# Altium PCB MCBPCB.PcbDoc (part 1 of 2)
Units mm, origin at the board's own origin, x right, y up, seen from the top; angles counter-clockwise.
Board outline 152.4 x 101.6 mm, 2 copper layers (Top Layer, Bottom Layer); 64 components, 34 nets, 224 pads, 0 vias.
Unrouted connection lines stored in the file: 144.
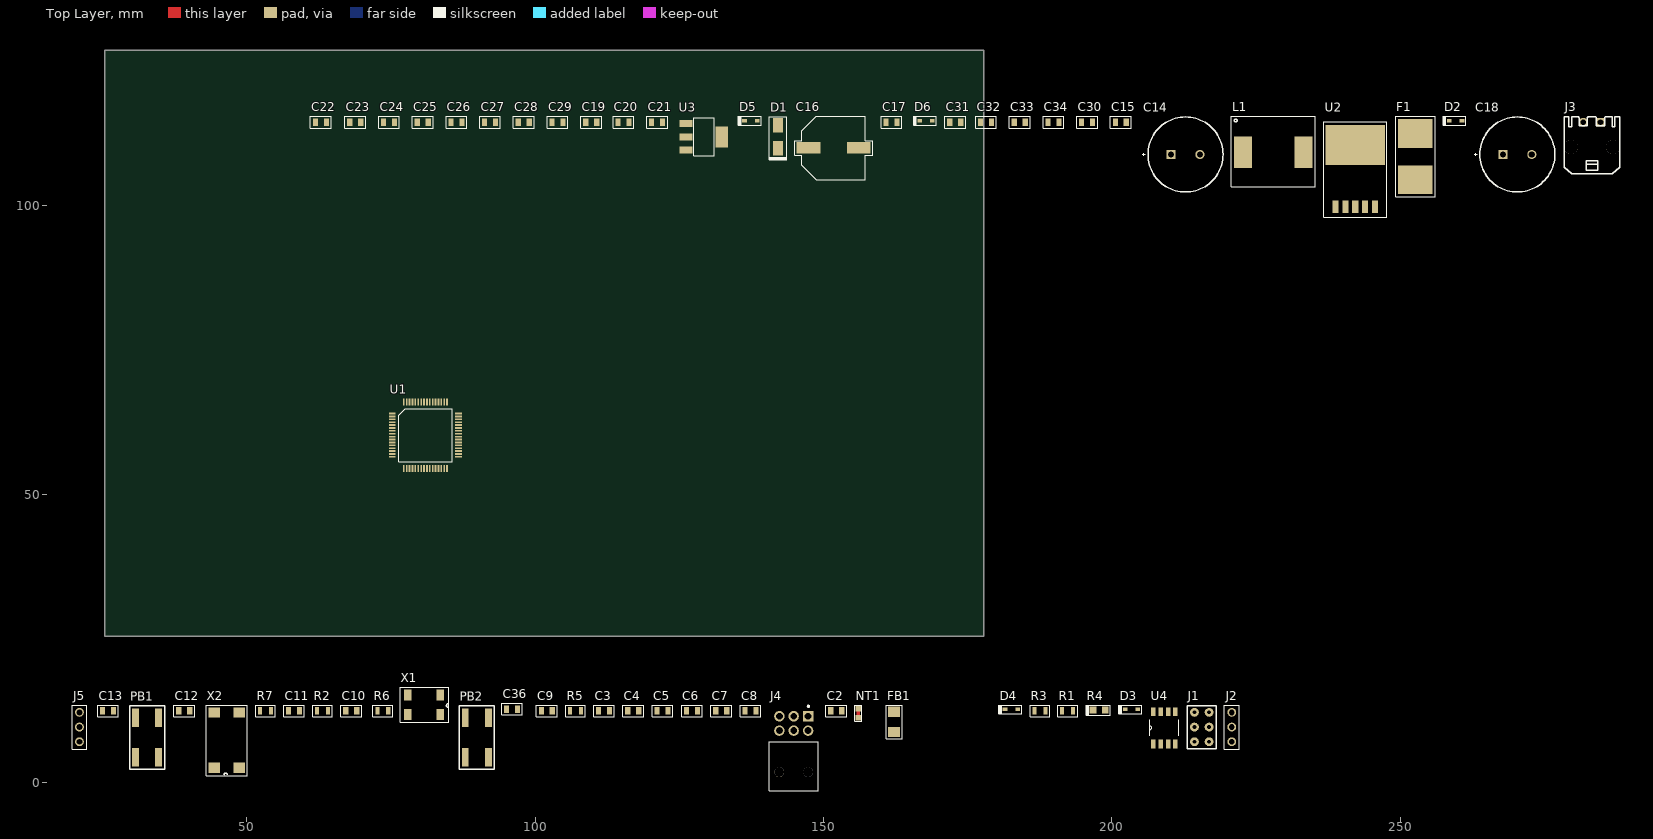
[diagram p0: Top Layer view]
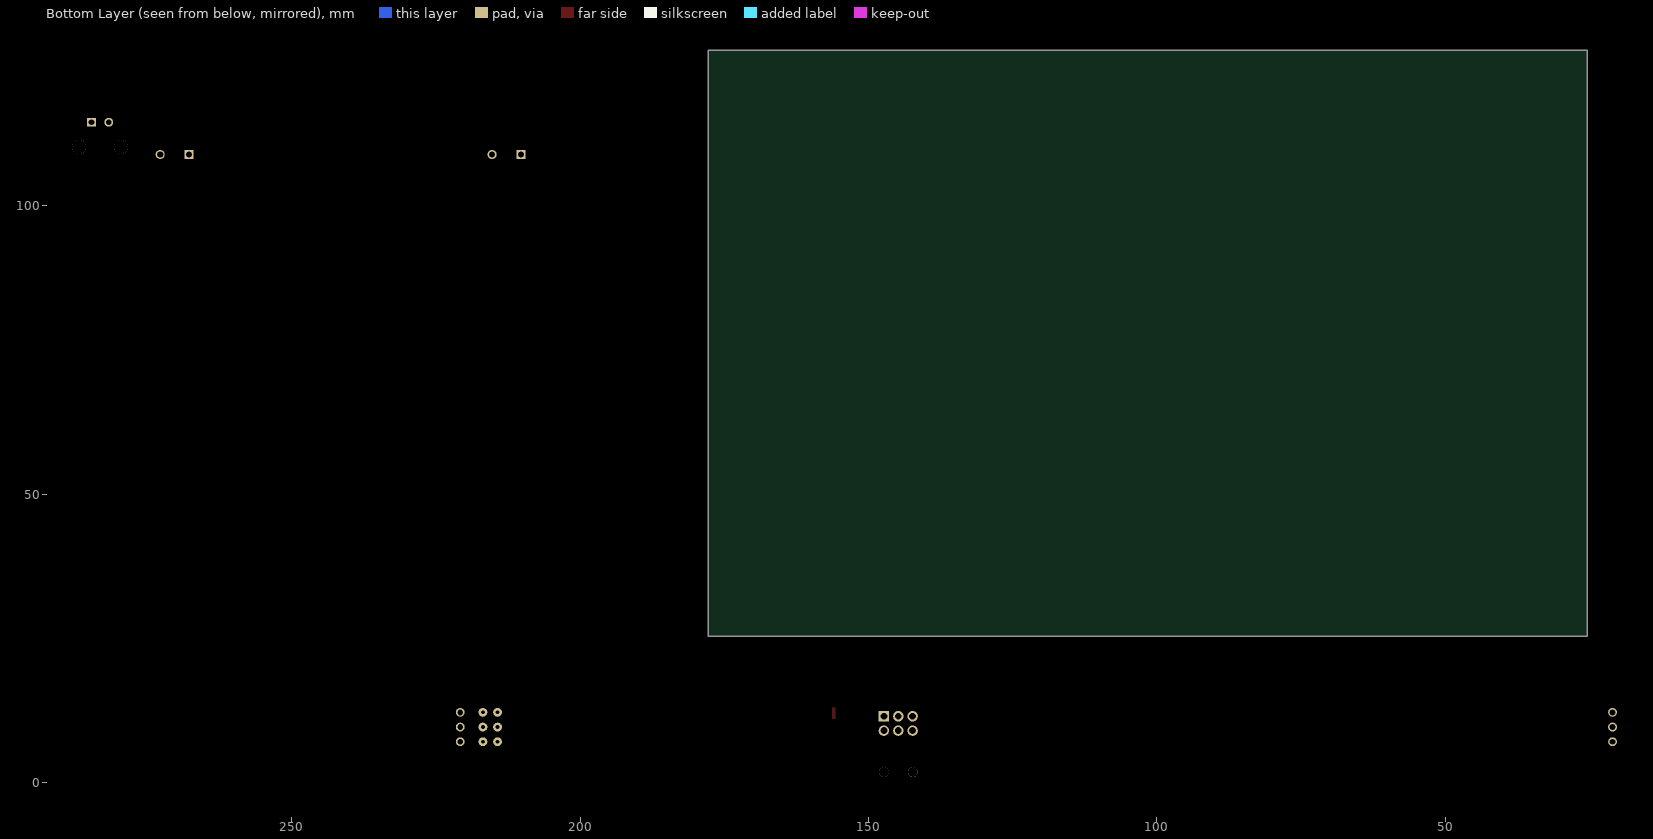
[diagram p1: Bottom Layer view, seen from below]

## Layer stack, top to bottom
Top Solder: solder mask 0.0102, Solder Resist, Dk 3.5
Top Layer: signal copper 0.0356
Dielectric 1: dielectric 0.32, FR-4, Dk 4.8
Bottom Layer: signal copper 0.0356
Bottom Solder: solder mask 0.0102, Solder Resist, Dk 3.5

## Board outline
25.4,25.4 177.8,25.4 177.8,127 25.4,127

## Design rules (kind name [scope] priority, off if disabled: settings)
Clearance [All] p1 off: gap=0.254 ignorepadtopadclearanceinfootprint=FALSE except(0: Arc-Hole Track-Hole SMDPad-Hole THPad-Hole Via-Hole Fill-Hole Poly-Hole Region-Hole Text-Hole)
PolygonConnect [All] p1: connectstyle=Relief reliefconductorwidth=0.254 reliefentries=4 polygonreliefangle="90 Angle" airgapwidth=0.254
RoomDefinition "Power Supply" [InComponentClass('Power Supply')] p1: confinementstyle=ConfineIn formatcopy=TRUE lockcomponents=FALSE outline 29.876,125.358 140.126,125.358 140.126,99.983 29.876,99.983
RoomDefinition M1 [InComponentClass('M1')] p2: confinementstyle=ConfineIn formatcopy=TRUE lockcomponents=FALSE outline 19.497,0 222.697,0 222.697,19.177 19.497,19.177
RoutingVias [All] p1: holewidth=0.711 width=1.27 viastyle="Through Hole" minholewidth=0.711 minwidth=1.27 maxholewidth=0.711 maxwidth=1.27
SolderMaskExpansion [All] p1: expansion=0.102
Width [All] p1: maxlimit=0.254 minlimit=0.254 preferedwidth=0.254
30 further rules are at their usual default settings.

## Classes and differential pairs
component class "Power Supply": C14 C15 C16 C17 C18 C19 C20 C21 C22 C23 C24 C25 C26 C27 C28 C29 C30 C31 C32 C33 C34 D1 D2 D5 D6 F1 J3 L1 U2 U3
component class M1: C1 C2 C3 C4 C5 C6 C7 C8 C9 C10 C11 C12 C13 C35 C36 D3 D4 FB1 J1 J2 J4 J5 NT1 PB1 PB2 R1 R2 R3 R4 R5 R6 R7 U4 X1 X2

## Components (designator, comment, footprint, x,y, rotation, side; value= is the part's Value field where it differs from the comment)
C2 "1uF" C0805 152.212,12.446 r0 top
C3 "1uF" C0805 111.953,12.446 r0 top
C4 "0.1uF" C0805 117.033,12.446 r0 top
C5 "0.1uF" C0805 122.113,12.446 r0 top
C6 "0.1uF" C0805 127.193,12.446 r0 top
C7 "0.1uF" C0805 132.273,12.446 r0 top
C8 "4.7uF" C0805 137.353,12.446 r0 top
C9 "6nF" C0805 102.047,12.446 r0 top
C10 "6nF" C0805 68.138,12.446 r0 top
C11 "20pF" C0805 58.232,12.446 r0 top
C12 "20pF" C0805 39.182,12.446 r0 top
C13 "0.1uF" C0805 25.974,12.446 r0 top
C14 "100uF" UCY2C101MHD1TO 215.271,108.912 r0 top
C15 "47uF" C0805 201.555,114.5 r0 top
C16 "680uF" EEE-FP1C681AP 151.771,110.055 r0 top
C17 "47uF" C0805 161.804,114.5 r0 top
C18 "100uF" UCY2C101MHD1TO 272.802,108.912 r0 top
C19 "0.1uF" C0805 109.734,114.5 r0 top
C20 "10uF" C0805 115.322,114.5 r0 top
C21 "0.1uF" C0805 121.164,114.5 r0 top
C22 "1uF" C0805 62.871,114.5 r0 top
C23 "0.1uF" C0805 68.84,114.5 r0 top
C24 "0.1uF" C0805 74.682,114.5 r0 top
C25 "0.1uF" C0805 80.524,114.5 r0 top
C26 "0.1uF" C0805 86.366,114.5 r0 top
C27 "1uF" C0805 92.208,114.5 r0 top
C28 "1uF" C0805 98.05,114.5 r0 top
C29 "1uF" C0805 103.892,114.5 r0 top
C30 "0.1uF" C0805 195.713,114.5 r0 top
C31 "0.1uF" C0805 172.853,114.5 r0 top
C32 "0.1uF" C0805 178.187,114.5 r0 top
C33 "1uF" C0805 184.029,114.5 r0 top
C34 "1uF" C0805 189.871,114.5 r0 top
C36 "1uF" C0805 96,12.75 r0 top
D1 "B320A-FDICT-ND" "DIODE DO-214AC" 142.119,111.96 r90 top
D2 "12V" SOD-323 259.594,114.754 r0 top
D3 "TVS Diode 5V" SOD-323 203.393,12.7 r0 top
D4 "TVS Diode 5V" SOD-323 182.565,12.7 r0 top
D5 "TVS Diode 12V" SOD-323 137.42,114.754 r0 top
D6 "TVS Diode 5V" SOD-323 167.773,114.754 r0 top
F1 "Fuseholder" "SCHURTER - 0031.7701.11 - FUSE HOLDER, PCB MOUNT" 252.609,108.531 r90 top
FB1 "LF1206E152R-10" L1206 162.245,10.541 r90 top
J1 "M20-9980346" M20-9980346 214.315,7.112 r0 top
J2 "1x3 HDR100" "MOLEX 0901200763" 220.792,7.112 r90 top
J3 "1x2 Header, RA" "Right Angle Header 43650-0205(Primary)" 283.216,110.182 r0 top
J4 "2x3 Socket, RA" "MOLEX 105314 6 CON" 144.846,7.112 r0 top
J5 "1x3 HDR100" "MOLEX 0901200763" 21.021,7.112 r90 top
L1 "100uH" 7447709101 227.971,109.293 r0 top
NT1 "NET TIE" NETTIE 156.022,12.065 r90 top
PB1 "P12961SCT-ND" P12961SCT-ND 170.754,116.713 r90 top
PB2 "P12961SCT-ND" P12961SCT-ND 227.904,116.713 r90 top
R1 "10K" R0805 192.344,12.446 r0 top
R2 "10K" R0805 63.185,12.446 r0 top
R3 "10K" R0805 187.518,12.446 r0 top
R4 "120 ohm" L0805 197.805,12.573 r0 top
R5 "RC0402JR-074K7L" R0805 107,12.446 r0 top
R6 "150" R0805 73.599,12.446 r0 top
R7 "300" R0805 53.279,12.446 r0 top
U1 "STM32F103RBT7" stm32f103rb 75.25,64 r0 top
U2 "LM2576SX-5.0" TO263-5 242.195,103.07 r90 top
U3 "LD1117S33CTR" SOT-233 129.292,111.96 r0 top
U4 "CAN, MCP2551" LT1677IS8#TRPBF 209.108,9.525 r90 top
X1 "32.7680kHz" "MC-306 32.7680K-E5" 80.75,13.5 r180 top
X2 "8 MHz" "MA-406 8.0000M-G3" 46.548,7.366 r90 top

## Footprints (in the part's own frame and the unit in brackets; to place one, negate y for a bottom-side part, rotate by r counter-clockwise, add the part's x,y. Pads: shape width x height; smd on the part's side, far side on the other; paste and mask are expansions set on the pad)
7447709101 [mm]
  rect 3.1x5.4 smd: 1(-5.25,0) 2(5.25,0)
  silkscreen extent -7.25,-6 7.25,6.25, body extent -6,-6 6,6, height 9.47
C0805 [mm]
  rect 0.9x1.3 smd: 1(-0.95,0) 2(0.95,0)
  silkscreen extent -1.8,-1 1.8,1, body extent -1.05,-0.67 1.05,0.67, height 0.94
"DIODE DO-214AC" [mm]
  rect 2.5x1.7 smd: 1(-2,0) 2(2,0)
  silkscreen extent -4,-1.5 3.5,1.5, body extent -2.74,-1.4 2.74,1.4, height 2.3
EEE-FP1C681AP [mm]
  rect 4.1x2 smd: 1(-4.35,0) 2(4.35,0)
  silkscreen extent -6.75,-5.5 6.75,5.5, body extent -5.85,-5.15 5.85,5.15, height 10.21
L0805 [mm]
  rect 1.2x1.2 smd: 1(-1.05,0) 2(1.05,0)
  silkscreen extent -2.29,-0.89 1.91,0.89, body extent -1,-0.62 1,0.63, height 0.82
L1206 [mm]
  rect 1.76x2.06 smd: 1(-1.75,0) 2(1.75,0)
  silkscreen extent -2.95,-1.38 2.9,1.33, body extent -1.6,-0.8 1.6,0.8, height 2.54
LT1677IS8#TRPBF [mil] "IC OPAMP GP 7.2MHZ RRO 8SO"
  rect 60x30 smd: 1(-110,75) 2(-110,25) 3(-110,-25) 4(-110,-75) 5(110,-75) 6(110,-25) 7(110,25) 8(110,75)
  silkscreen extent -56,-99 56,99, body extent -121,-98 121,98, height 79
M20-9980346 [mil]
  round 60 hole 25.2: 1(0,200) 2(0,100) 3(0,0) 4(100,0) 5(100,100) 6(100,200)
  silkscreen extent -49,-49 148,246, body extent -51,-50 149,250, height 374
"MA-406 8.0000M-G3" [mm] "MA-406 8.0000M-G3"
  rect 1.8x2 smd: 1(-4.8,-2.2) 2(4.8,-2.2) 3(4.8,2.2) 4(-4.8,2.2)
  silkscreen extent -6.15,-3.52 6.1,3.55, body extent -5.77,-2.35 5.93,2.45, height 3.7
"MC-306 32.7680K-E5" [mm] "CRYSTAL 32.7680 KHZ 6.0PF SMD"
  rect 1.3x1.9 smd: 1(-2.8,-1.7) 2(2.8,-1.7) 3(2.8,1.7) 4(-2.8,1.7)
  silkscreen extent -4.3,-3.03 4.15,3, body extent -4.07,-1.77 3.93,2.03, height 2.39
"MOLEX 105314 6 CON" [mm]
  rect 1.8x1.8 hole 1.2: 1(2.5,4.408)
  round 1.8 hole 1.2: 2(2.5,1.908) 3(0,4.408) 4(0,1.908) 5(-2.5,4.408) 6(-2.5,1.908)
  round 1.7 hole 1.7 unplated: None(-2.5,-5.272) None(2.5,-5.272)
  silkscreen extent -4.22,-8.47 4.22,6.28, body extent -4.22,-9.87 4.22,4.79, height 8.85
"MOLEX 0901200763" [mil]
  round 60 hole 39.37: 1(0,0) 2(100,0) 3(200,0)
  silkscreen extent -50,-50 250,50, body extent -50,-49 250,49, height 365
NETTIE [mm]
  rect 1x1 smd paste+0 mask+0: 0(-0.8,0) 1(0.8,0)
  Top Layer region: -1,-0.3 1,-0.3 1,0.3 -1,0.3
  silkscreen extent -1.4,-0.6 1.4,0.6
P12961SCT-ND [mm] "SWITCH TACTILE SPST-NO 0.02A 15V"
  rect 3.2x1.2 smd: 1(-112.275,140) 2(-105.475,140) 3(-112.275,136) 4(-105.475,136)
  silkscreen extent -114.35,134.98 -103.38,141.05, body extent -112.17,135.1 -105.58,141.1, height 3.11
R0805 [mm]
  rect 0.7x1.3 smd: 1(-0.95,0) 2(0.95,0)
  silkscreen extent -1.7,-1 1.7,1, body extent -1.05,-0.67 1.05,0.68, height 0.6
"Right Angle Header 43650-0205(Primary)" [mm]
  rect 1.53x1.53 hole 1.02: 1(1.5,4.32)
  round 1.53 hole 1.02: 2(-1.5,4.32)
  round 2.413 hole 2.413 unplated: None(-3.645,0) None(3.645,0)
  silkscreen extent -4.82,-4.6 4.82,5.3, body extent -4.83,-4.59 4.83,5.31, height 5.58
"SCHURTER - 0031.7701.11 - FUSE HOLDER, PCB MOUNT" [mm]
  rect 5x6 smd: 1(-4,0) 2(4,0)
  silkscreen extent -6.98,-3.43 6.98,3.43, body extent -6.04,-2.6 6.04,2.6, height 6.01
SOD-323 [mm] "SOD, 2-Leads, Body 1.7x1.25mm"
  rect 0.8x0.6 smd: 1(-1.1,0) 2(1.1,0)
  silkscreen extent -2.16,-0.76 1.78,0.76, body extent -1.3,-0.67 1.3,0.68, height 1.1
SOT-233 [mil] "SOT223"
  rect 88x48 smd: 1(-122,91) 2(-122,0) 3(-122,-91)
  rect 86.61x141.73 smd: 4(122.01,0)
  silkscreen extent -69,-129 70,129, body extent -137,-128 137,128, height 100
stm32f103rb [mm]
  rect 1.2x0.3 smd: 1(0,0) 2(0,-0.5) 3(0,-1) 4(0,-1.5) 5(0,-2) 6(0,-2.5) 7(0,-3) 8(0,-3.5) 9(0,-4) 10(0,-4.5) 11(0,-5) 12(0,-5.5) 13(0,-6) 14(0,-6.5) 15(0,-7) 16(0,-7.5) 33(11.5,-7.5) 34(11.5,-7) 35(11.5,-6.5) 36(11.5,-6) 37(11.5,-5.5) 38(11.5,-5) 39(11.5,-4.5) 40(11.5,-4) 41(11.5,-3.5) 42(11.5,-3) 43(11.5,-2.5) 44(11.5,-2) 45(11.5,-1.5) 46(11.5,-1) 47(11.5,-0.5) 48(11.5,0)
  rect 0.3x1.2 smd: 17(2,-9.5) 18(2.5,-9.5) 19(3,-9.5) 20(3.5,-9.5) 21(4,-9.5) 22(4.5,-9.5) 23(5,-9.5) 24(5.5,-9.5) 25(6,-9.5) 26(6.5,-9.5) 27(7,-9.5) 28(7.5,-9.5) 29(8,-9.5) 30(8.5,-9.5) 31(9,-9.5) 32(9.5,-9.5) 49(9.5,2) 50(9,2) 51(8.5,2) 52(8,2) 53(7.5,2) 54(7,2) 55(6.5,2) 56(6,2) 57(5.5,2) 58(5,2) 59(4.5,2) 60(4,2) 61(3.5,2) 62(3,2) 63(2.5,2) 64(2,2)
  silkscreen extent 1.13,-8.36 10.36,0.87, body extent -0.2,-9.7 11.8,2.3, height 1.6
TO263-5 [mm]
  rect 2.16x1.07 smd: 1(-3.25,3.4) 2(-3.25,1.7) 3(-3.25,0) 4(-3.25,-1.7) 5(-3.25,-3.4)
  rect 6.99x10.3 smd: 6(7.5,0)
  silkscreen extent -5,-5.5 11.5,5.5, body extent -3.81,-5 12.5,4.91, height 4.22
UCY2C101MHD1TO [mil]
  rect 62x62 hole 42: 1(-196.85,0)
  round 62 hole 42: 2(0,0)
  silkscreen extent -394,-256 157,256, body extent -344,-246 148,246, height 778

## Part data
C2 C3 C22 C27 C28 C29 C33 C34 C36: library part CL21B105KAFNNNE, "Cap Ceramic 1uF 25V X7R 10% SMD 0805 125C T/R", Case/Package=0805, Case Code (Metric)=2012, Dielectric=X7R, Manufacturer=Samsung, Max Operating Temperature=125°C, Min Operating Temperature=-55°C, Package Quantity=1, Supplier Part Number 1=1276-1066-1-ND, Tolerance=10%, Voltage=25V, Capacitance=1uF, Case Code (Imperial)=0805, Category=Capacitors, ComponentLink1Description=https://datasheet.ciiva.com/25800/cl21b105kafnnne-25800163.pdf?src-supplier=Digi-Key, ComponentLink1URL=https://datasheet.ciiva.com/25800/cl21b105kafnnne-25800163.pdf?src-supplier=Digi-Key, ComponentLink2Description=https://datasheet.ciiva.com/15195/getdatasheetpartid-355205-15195880.pdf?src-supplier=Verical, ComponentLink2URL=https://datasheet.ciiva.com/15195/getdatasheetpartid-355205-15195880.pdf?src-supplier=Verical, Contact Plating=Tin, Depth=1.25mm, Height=1.25mm, Lead Free="Lead Free", Length=2mm, Manufacturer Part Number=CL21B105KAFNNNE, Mount="Surface Mount", Packaging="Tape and Reel", Pricing 1="1 = 0.10000, 10 = 0.07600, 100 = 0.03380, 500 = 0.02416, 1000 = 0.01898 (USD)", Radiation Hardening=No, RoHS=Yes, Stock 1=1606570, Supplier 1=Digi-Key, Thickness=0.053inch, Voltage Rating=25V, Voltage Rating (DC)=25V, Width=0.049inch
C4 C5 C6 C7 C13 C19 C21 C23 C24 C25 C26 C30 C31 C32: library part CL21B104KBCWPNC, "CAP CER 0.1UF 50V X7R 0805", Capacitance=100nF, Case/Package=0805, Case Code (Metric)=2012, Manufacturer=Samsung, Max Operating Temperature=125°C, Min Operating Temperature=-55°C, Ratings=AEC-Q200, Supplier Part Number 1=1276-6557-1-ND, Tolerance=10%, Voltage Rating=50V, Case Code (Imperial)=0805, Category=Capacitors, Features="Soft Termination", Length=0.079inch, Manufacturer Part Number=CL21B104KBCWPNC, Mount="Surface Mount", Packaging="Tape and Reel", Pricing 1="1 = 0.10000, 10 = 0.06700, 100 = 0.02990, 500 = 0.02138, 1000 = 0.01680 (USD)", RoHS=Yes, Stock 1=6545, Supplier 1=Digi-Key, Thickness=0.053inch, Width=0.049inch
C8: library part 311-1371-2-ND, "CAP CER 4.7UF 10V Y5V 0805", Case/Package=0805, Case Code (Metric)=2012, Dielectric=Y5V, Manufacturer 1=Yageo, Manufacturer Part Number 1=CC0805ZRY5V6BB475, Max Operating Temperature=85°C, Min Operating Temperature=-30°C, Package Quantity=1, Supplier Part Number 1=311-1371-1-ND, Tolerance=80%, Voltage Rating=10V, Capacitance=4.7uF, Case Code (Imperial)=0805, ComponentLink1Description=https://datasheet.ciiva.com/26863/getdatasheetpartid-251807-26863009.pdf?src-supplier=Verical, ComponentLink1URL=https://datasheet.ciiva.com/26863/getdatasheetpartid-251807-26863009.pdf?src-supplier=Verical, ComponentLink2Description=https://datasheet.ciiva.com/144/mlccorderingcode-144864.pdf?src-supplier=Digi-Key, ComponentLink2URL=https://datasheet.ciiva.com/144/mlccorderingcode-144864.pdf?src-supplier=Digi-Key, ComponentLink3Description=https://datasheet.ciiva.com/144/mlccorderingcode-144865.pdf?src-supplier=Digi-Key, ComponentLink3URL=https://datasheet.ciiva.com/144/mlccorderingcode-144865.pdf?src-supplier=Digi-Key, ComponentLink4Description=https://datasheet.ciiva.com/11465/upy-gphc-y5v-6-3v-to-50v-5-11465845.pdf?src-supplier=Avnet, ComponentLink4URL=https://datasheet.ciiva.com/11465/upy-gphc-y5v-6-3v-to-50v-5-11465845.pdf?src-supplier=Avnet, ComponentLink5Description=https://datasheet.ciiva.com/16624/upy-gphc-y5v-6-3v-to-50v-5-16624679.pdf?src-supplier=Avnet+Europe, ComponentLink5URL=https://datasheet.ciiva.com/16624/upy-gphc-y5v-6-3v-to-50v-5-16624679.pdf?src-supplier=Avnet+Europe, ComponentLink6Description=https://datasheet.ciiva.com/28450/1132289-28450855.pdf?src-supplier=Element14, ComponentLink6URL=https://datasheet.ciiva.com/28450/1132289-28450855.pdf?src-supplier=Element14, ComponentLink7Description=https://datasheet.ciiva.com/7978/1132289-7978222.pdf?src-supplier=Element14, ComponentLink7URL=https://datasheet.ciiva.com/7978/1132289-7978222.pdf?src-supplier=Element14, ComponentLink8Description=https://datasheet.ciiva.com/144/mlccorderingcode-144863.pdf?src-supplier=Digi-Key, ComponentLink8URL=https://datasheet.ciiva.com/144/mlccorderingcode-144863.pdf?src-supplier=Digi-Key, ComponentLink9Description=https://datasheet.ciiva.com/5425/upy-gp-np0-16v-to-50v-8-5425455.pdf?src-supplier=Mouser, ComponentLink9URL=https://datasheet.ciiva.com/5425/upy-gp-np0-16v-to-50v-8-5425455.pdf?src-supplier=Mouser, ComponentLink10Description=https://datasheet.ciiva.com/17004/upy-gphc-y5v-6-3v-to-50v-5-revised-17004479.pdf?src-supplier=Future+Electronics, ComponentLink10URL=https://datasheet.ciiva.com/17004/upy-gphc-y5v-6-3v-to-50v-5-revised-17004479.pdf?src-supplier=Future+Electronics, Composition=Ceramic, Depth=1.25mm, Halogen Free="Halogen Free", Height=0.85mm, Lead Free="Lead Free", Length=2mm, Mount="Surface Mount", Number of Pins=2, Packaging="Tape and Reel", Pricing 1="1=0.19000, 10=0.13200, 100=0.06670, 500=0.04564, 1000=0.04037 (USD)", Radiation Hardening=No, REACH SVHC=Unknown, RoHS=Yes, Stock 1=117585, Supplier 1=Digi-Key, Termination=SMD/SMT, Thickness=0.033inch, Voltage Rating (DC)=10V, Width=0.049inch
C9 C10: library part 478-10411-2-ND, "CAP CER 6PF 100V C0G/NP0 0805", Capacitance=9pF, Case/Package=0805, Case Code (Metric)=2012, Dielectric=C0G, Max Operating Temperature=125°C, Min Operating Temperature=-55°C, Package Quantity=4000, Voltage Rating=100V, Case Code (Imperial)=0805, ComponentLink1Description=https://www.digikey.com/product-detail/en/avx-corporation/08051A6R0CAT2A/478-10411-2-ND/1601219, ComponentLink1URL=https://www.digikey.com/product-detail/en/avx-corporation/08051A6R0CAT2A/478-10411-2-ND/1601219, Depth=1.25mm, Length=2.01mm, Mount="Surface Mount", Packaging="Tape and Reel", Radiation Hardening=No, RoHS=Yes, Supplier 1=Digi-Key, Supplier Part Number 1=478-10411-2-ND, Termination=SMD/SMT, Thickness=0.037inch, Voltage Rating (DC)=100V, Weight=0.000194oz, Width=1.25mm
C11 C12: library part C0805C200J5GACTU, "CAP CER 20PF 50V C0G/NP0 0805", Capacitance=10nF, Case/Package=0805, Case Code (Metric)=2012, Dielectric=X7R, Manufacturer=Samsung, Manufacturer Part Number=CL21B103KBANNNC, Max Operating Temperature=125°C, Min Operating Temperature=-55°C, Supplier Part Number 1=399-8033-1-ND, Tolerance=10%, Voltage=50V, Case Code (Imperial)=0805, Category=Capacitors, ComponentLink1Description=https://www.digikey.com/product-detail/en/kemet/C0805C200J5GACTU/399-8033-1-ND/3471756, ComponentLink1URL=https://www.digikey.com/product-detail/en/kemet/C0805C200J5GACTU/399-8033-1-ND/3471756, Contact Plating=Tin, Depth=1.25mm, Height=0.65mm, Lead Free="Lead Free", Length=2mm, Material=Ceramic, Mount="Surface Mount", Packaging="Tape and Reel", Radiation Hardening=No, RoHS=Yes, Supplier 1=Digi-Key, Thickness=0.03inch, Voltage Rating=50V, Voltage Rating (DC)=50V, Width=0.049inch
C14 C18: library part UCY2C101MHD1TO, "CAP ALUM 100UF 20% 160V RADIAL", Capacitance=9pF, Case/Package=0805, Case Code (Metric)=2012, Dielectric=C0G, Max Operating Temperature=125°C, Min Operating Temperature=-55°C, Package Quantity=4000, Supplier Part Number 1=493-4784-1-ND, Voltage Rating=100V, Case Code (Imperial)=0805, ComponentLink1Description=https://www.digikey.ca/product-detail/en/nichicon/UCY2C101MHD1TO/493-4784-1-ND/3129121, ComponentLink1URL=https://www.digikey.ca/product-detail/en/nichicon/UCY2C101MHD1TO/493-4784-1-ND/3129121, Depth=1.25mm, Length=2.01mm, Mount="Surface Mount", Packaging="Tape and Reel", Radiation Hardening=No, RoHS=Yes, Supplier 1=Digi-Key, Termination=SMD/SMT, Thickness=0.037inch, Voltage Rating (DC)=100V, Weight=0.000194oz, Width=1.25mm
C15 C17: library part GRM21BR61A476ME15L, "CAP CER 47UF 10V X5R 0805", Capacitance=4.7uF, Case/Package=0805, Case Code (Metric)=2012, Dielectric=Y5V, Max Operating Temperature=85°C, Min Operating Temperature=-30°C, Package Quantity=1, Supplier Part Number 1=490-9961-1-ND, Tolerance=80%, Voltage Rating=10V, Case Code (Imperial)=0805, Composition=Ceramic, Depth=1.25mm, Halogen Free="Halogen Free", Height=0.85mm, Lead Free="Lead Free", Length=2mm, Mount="Surface Mount", Number of Pins=2, Packaging="Tape and Reel", Radiation Hardening=No, REACH SVHC=Unknown, RoHS=Yes, Supplier 1=Digi-Key, Termination=SMD/SMT, Thickness=0.033inch, Voltage Rating (DC)=10V, Width=0.049inch
C16: library part EEE-FP1C681AP, "CAP ALUM 680UF 20% 16V SMD", Capacitance=9pF, Case/Package=0805, Case Code (Metric)=2012, Dielectric=C0G, Max Operating Temperature=125°C, Min Operating Temperature=-55°C, Package Quantity=4000, Supplier Part Number 1=PCE4437CT-ND, Voltage Rating=100V, Case Code (Imperial)=0805, ComponentLink1Description=https://www.digikey.ca/product-detail/en/panasonic-electronic-components/EEE-FP1C681AP/PCE4437CT-ND/1246017, ComponentLink1URL=https://www.digikey.ca/product-detail/en/panasonic-electronic-components/EEE-FP1C681AP/PCE4437CT-ND/1246017, Depth=1.25mm, Length=2.01mm, Mount="Surface Mount", Packaging="Tape and Reel", Radiation Hardening=No, RoHS=Yes, Supplier 1=Digi-Key, Termination=SMD/SMT, Thickness=0.037inch, Voltage Rating (DC)=100V, Weight=0.000194oz, Width=1.25mm
C20: library part C0805C106K8PACTU, "CAP CER 10UF 10V X5R 0805", Capacitance=1uF, Case/Package=0805, Case Code (Metric)=2012, Dielectric=X7R, Manufacturer=Samsung, Manufacturer Part Number=CL21B105KAFNNNE, Max Operating Temperature=125°C, Min Operating Temperature=-55°C, Package Quantity=1, Supplier Part Number 1=399-4925-1-ND, Tolerance=10%, Voltage=25V, Case Code (Imperial)=0805, Category=Capacitors, ComponentLink1Description=https://www.digikey.ca/product-detail/en/kemet/C0805C106K8PACTU/399-4925-1-ND/1090920, ComponentLink1URL=https://www.digikey.ca/product-detail/en/kemet/C0805C106K8PACTU/399-4925-1-ND/1090920, Contact Plating=Tin, Depth=1.25mm, Height=1.25mm, Lead Free="Lead Free", Length=2mm, Mount="Surface Mount", Packaging="Tape and Reel", Radiation Hardening=No, RoHS=Yes, Supplier 1=Digi-Key, Thickness=0.053inch, Voltage Rating=25V, Voltage Rating (DC)=25V, Width=0.049inch
D1: "DIODE SCHOTTKY 20V 3A SMA", Supplier 1=Digi-Key, Supplier Part Number 1=B320A-FDICT-ND
D2: library part SD12T1G, "TVS DIODE 12V 19V SOD323", Breakdown Voltage=13.3V, Capacitance=150pF, Case/Package=SOD-323-2, Clamping Voltage=25V, Leakage Current=1uA, Manufacturer="ON Semiconductor", Max Breakdown Voltage=15.75V, Max Operating Temperature=150°C, Max Surge Current=15A, Min Operating Temperature=-55°C, Package Quantity=1, Peak Pulse Power=350W, Power Line Protection=No, Supplier Part Number 1=SD12T1GOSCT-ND, Test Current=1mA, Category="Circuit Protection", ComponentLink1Description=https://datasheet.ciiva.com/11193/sd05t1-d-11193474.pdf?src-supplier=Avnet, ComponentLink1URL=https://datasheet.ciiva.com/11193/sd05t1-d-11193474.pdf?src-supplier=Avnet, ComponentLink2Description=https://datasheet.ciiva.com/15143/getdatasheetpartid-52921-15143109.pdf?src-supplier=Verical, ComponentLink2URL=https://datasheet.ciiva.com/15143/getdatasheetpartid-52921-15143109.pdf?src-supplier=Verical, ComponentLink3Description=https://datasheet.ciiva.com/30479/0900766b81250bd7-30479026.pdf?src-supplier=RSComponents, ComponentLink3URL=https://datasheet.ciiva.com/30479/0900766b81250bd7-30479026.pdf?src-supplier=RSComponents, ComponentLink4Description=https://datasheet.ciiva.com/339/sd05t1-d-339833.pdf?src-supplier=Digi-Key, ComponentLink4URL=https://datasheet.ciiva.com/339/sd05t1-d-339833.pdf?src-supplier=Digi-Key, ComponentLink5Description=https://datasheet.ciiva.com/11193/sd05t1-d-11193470.pdf?src-supplier=Avnet, ComponentLink5URL=https://datasheet.ciiva.com/11193/sd05t1-d-11193470.pdf?src-supplier=Avnet, ComponentLink6Description=https://datasheet.ciiva.com/339/sd05t1-d-339832.pdf?src-supplier=Digi-Key, ComponentLink6URL=https://datasheet.ciiva.com/339/sd05t1-d-339832.pdf?src-supplier=Digi-Key, ComponentLink7Description=https://datasheet.ciiva.com/339/sd05t1-d-339834.pdf?src-supplier=Digi-Key, ComponentLink7URL=https://datasheet.ciiva.com/339/sd05t1-d-339834.pdf?src-supplier=Digi-Key, Composition=Zener, Contact Plating=Tin, Depth=1.25mm, Direction=Unidirectional, Element Configuration=Single, ESD Protection=Yes, Height=1mm, Lead Free="Lead Free", Length=1.7mm, Manufacturer Part Number=SD12T1G, Max Reverse Leakage Current=1uA, Min Breakdown Voltage=13.3V, Number of Channels=1, Number of Elements=1, Number of Pins=2, Number of Unidirectional Channels=1, Operating Supply Voltage=12V, Packaging="Tape and Reel", Peak Pulse Current=15A, Polarity=Unidirectional, Power Dissipation=350W, Pricing 1="1 = 0.47000, 10 = 0.34900, 100 = 0.19740, 500 = 0.13076, 1000 = 0.10025 (USD)", Radiation Hardening=No, Reverse Breakdown Voltage=13.3V, Reverse Standoff Voltage=12V, RoHS=Yes, Stock 1=159232, Supplier 1=Digi-Key, Termination=SMD/SMT, Voltage Rating (DC)=12V, Width=1.35mm, Working Voltage=12V
D3 D4 D6: library part SD05T1G, "TVS DIODE 5V 9.8V SOD323", Breakdown Voltage=6.75V, Capacitance=350pF, Case/Package=SOD-323-2, Clamping Voltage=14.5V, Leakage Current=10uA, Manufacturer="ON Semiconductor", Max Breakdown Voltage=7.3V, Max Operating Temperature=150°C, Max Output Current=24A, Max Power Dissipation=200mW, Min Breakdown Voltage=6.2V, Min Operating Temperature=-55°C, Operating Supply Voltage=5V, Package Quantity=1, Peak Pulse Power=350W, Power Line Protection=No, Supplier Part Number 1=SD05T1GOSCT-ND, Test Current=1mA, Category="Circuit Protection", ComponentLink1Description=https://datasheet.ciiva.com/4507/sd05t1-d-241634-4507873.pdf?src-supplier=Mouser, ComponentLink1URL=https://datasheet.ciiva.com/4507/sd05t1-d-241634-4507873.pdf?src-supplier=Mouser, ComponentLink2Description=https://datasheet.ciiva.com/16200/sd05t1-d-16200994.pdf?src-supplier=Future+Electronics, ComponentLink2URL=https://datasheet.ciiva.com/16200/sd05t1-d-16200994.pdf?src-supplier=Future+Electronics, ComponentLink3Description=https://datasheet.ciiva.com/15143/getdatasheetpartid-117154-15143559.pdf?src-supplier=Verical, ComponentLink3URL=https://datasheet.ciiva.com/15143/getdatasheetpartid-117154-15143559.pdf?src-supplier=Verical, ComponentLink4Description=https://datasheet.ciiva.com/30478/0900766b81250bd7-30478714.pdf?src-supplier=RSComponents, ComponentLink4URL=https://datasheet.ciiva.com/30478/0900766b81250bd7-30478714.pdf?src-supplier=RSComponents, ComponentLink5Description=https://datasheet.ciiva.com/339/sd05t1-d-339830.pdf?src-supplier=Digi-Key, ComponentLink5URL=https://datasheet.ciiva.com/339/sd05t1-d-339830.pdf?src-supplier=Digi-Key, ComponentLink6Description=https://datasheet.ciiva.com/339/sd05t1-d-339831.pdf?src-supplier=Digi-Key, ComponentLink6URL=https://datasheet.ciiva.com/339/sd05t1-d-339831.pdf?src-supplier=Digi-Key, ComponentLink7Description=https://datasheet.ciiva.com/11193/sd05t1-d-11193467.pdf?src-supplier=Avnet, ComponentLink7URL=https://datasheet.ciiva.com/11193/sd05t1-d-11193467.pdf?src-supplier=Avnet, ComponentLink8Description=https://datasheet.ciiva.com/22637/1878253-22637228.pdf?src-supplier=Element14, ComponentLink8URL=https://datasheet.ciiva.com/22637/1878253-22637228.pdf?src-supplier=Element14, ComponentLink9Description=https://datasheet.ciiva.com/25956/sd05t1-d-25956638.pdf?src-supplier=Avnet+Europe, ComponentLink9URL=https://datasheet.ciiva.com/25956/sd05t1-d-25956638.pdf?src-supplier=Avnet+Europe, Composition=Zener, Contact Plating=Tin, Depth=1.25mm, Direction=Unidirectional, Element Configuration=Single, ESD Protection=Yes, Height=1mm, Lead Free="Lead Free", Length=1.7mm, Manufacturer Part Number=SD05T1G, Max Reverse Leakage Current=10uA, Max Surge Current=24A, Number of Elements=1, Number of Pins=2, Number of Unidirectional Channels=1, Packaging="Tape and Reel", Peak Pulse Current=24A, Polarity=Unidirectional, Power Dissipation=350W, Pricing 1="1 = 0.49000, 10 = 0.36500, 100 = 0.20680, 500 = 0.13698, 1000 = 0.10502 (USD)", Radiation Hardening=No, REACH SVHC="No SVHC", Reverse Breakdown Voltage=6.2V, Reverse Standoff Voltage=5V, RoHS=Yes, Stock 1=61559, Supplier 1=Digi-Key, Termination=SMD/SMT, Voltage Rating (DC)=5V, Width=1.35mm, Working Voltage=5V
D5: library part SD12T1G, "TVS DIODE 12V 19V SOD323", Breakdown Voltage=13.3V, Capacitance=150pF, Case/Package=SOD-323-2, Clamping Voltage=25V, Leakage Current=1uA, Manufacturer="ON Semiconductor", Max Breakdown Voltage=15.75V, Max Operating Temperature=150°C, Max Surge Current=15A, Min Operating Temperature=-55°C, Operating Supply Voltage=12V, Package Quantity=1, Peak Pulse Power=350W, Power Line Protection=No, Supplier Part Number 1=SD12T1GOSCT-ND, Test Current=1mA, Category="Circuit Protection", ComponentLink1Description=https://datasheet.ciiva.com/11193/sd05t1-d-11193474.pdf?src-supplier=Avnet, ComponentLink1URL=https://datasheet.ciiva.com/11193/sd05t1-d-11193474.pdf?src-supplier=Avnet, ComponentLink2Description=https://datasheet.ciiva.com/15143/getdatasheetpartid-52921-15143109.pdf?src-supplier=Verical, ComponentLink2URL=https://datasheet.ciiva.com/15143/getdatasheetpartid-52921-15143109.pdf?src-supplier=Verical, ComponentLink3Description=https://datasheet.ciiva.com/30479/0900766b81250bd7-30479026.pdf?src-supplier=RSComponents, ComponentLink3URL=https://datasheet.ciiva.com/30479/0900766b81250bd7-30479026.pdf?src-supplier=RSComponents, ComponentLink4Description=https://datasheet.ciiva.com/339/sd05t1-d-339833.pdf?src-supplier=Digi-Key, ComponentLink4URL=https://datasheet.ciiva.com/339/sd05t1-d-339833.pdf?src-supplier=Digi-Key, ComponentLink5Description=https://datasheet.ciiva.com/11193/sd05t1-d-11193470.pdf?src-supplier=Avnet, ComponentLink5URL=https://datasheet.ciiva.com/11193/sd05t1-d-11193470.pdf?src-supplier=Avnet, ComponentLink6Description=https://datasheet.ciiva.com/339/sd05t1-d-339832.pdf?src-supplier=Digi-Key, ComponentLink6URL=https://datasheet.ciiva.com/339/sd05t1-d-339832.pdf?src-supplier=Digi-Key, ComponentLink7Description=https://datasheet.ciiva.com/339/sd05t1-d-339834.pdf?src-supplier=Digi-Key, ComponentLink7URL=https://datasheet.ciiva.com/339/sd05t1-d-339834.pdf?src-supplier=Digi-Key, Composition=Zener, Contact Plating=Tin, Depth=1.25mm, Direction=Unidirectional, Element Configuration=Single, ESD Protection=Yes, Height=1mm, Lead Free="Lead Free", Length=1.7mm, Manufacturer Part Number=SD12T1G, Max Reverse Leakage Current=1uA, Min Breakdown Voltage=13.3V, Number of Channels=1, Number of Elements=1, Number of Pins=2, Number of Unidirectional Channels=1, Packaging="Tape and Reel", Peak Pulse Current=15A, Polarity=Unidirectional, Power Dissipation=350W, Pricing 1="1 = 0.47000, 10 = 0.34900, 100 = 0.19740, 500 = 0.13076, 1000 = 0.10025 (USD)", Radiation Hardening=No, Reverse Breakdown Voltage=13.3V, Reverse Standoff Voltage=12V, RoHS=Yes, Stock 1=159232, Supplier 1=Digi-Key, Termination=SMD/SMT, Voltage Rating (DC)=12V, Width=1.35mm, Working Voltage=12V
F1: library part 0031.7701.11, "SCHURTER - 0031.7701.11 - FUSE HOLDER, PCB MOUNT", Color=White, Current Rating=5A, Manufacturer=Schurter, Max Operating Temperature=85°C, Min Operating Temperature=-40°C, Package Quantity=100, Supplier Part Number 1=486-1991-ND, Voltage=125V, Body Material=Thermoplastic, Category="Circuit Protection", ComponentLink1Description=https://datasheet.ciiva.com/1270/typ-omh-125-1270896.pdf?src-supplier=Element14, ComponentLink1URL=https://datasheet.ciiva.com/1270/typ-omh-125-1270896.pdf?src-supplier=Element14, ComponentLink2Description=https://datasheet.ciiva.com/7496/typ-omh-125-7496724.pdf?src-supplier=Digi-Key, ComponentLink2URL=https://datasheet.ciiva.com/7496/typ-omh-125-7496724.pdf?src-supplier=Digi-Key, ComponentLink3Description=https://datasheet.ciiva.com/16215/typ-omh-125-16215096.pdf?src-supplier=Onlinecomponents.com, ComponentLink3URL=https://datasheet.ciiva.com/16215/typ-omh-125-16215096.pdf?src-supplier=Onlinecomponents.com, ComponentLink4Description=https://datasheet.ciiva.com/30058/73typ-omh-125-30058618.pdf?src-supplier=Onlinecomponents.com, ComponentLink4URL=https://datasheet.ciiva.com/30058/73typ-omh-125-30058618.pdf?src-supplier=Onlinecomponents.com, ComponentLink5Description=https://datasheet.ciiva.com/14128/awomh125-data-e-14128364.pdf?src-supplier=Distrelec, ComponentLink5URL=https://datasheet.ciiva.com/14128/awomh125-data-e-14128364.pdf?src-supplier=Distrelec, ComponentLink6Description=https://datasheet.ciiva.com/1221/1925349-1221826.pdf?src-supplier=Newark, ComponentLink6URL=https://datasheet.ciiva.com/1221/1925349-1221826.pdf?src-supplier=Newark, ComponentLink7Description=https://datasheet.ciiva.com/3014/typ-omh-125-3014522.pdf?src-supplier=Avnet, ComponentLink7URL=https://datasheet.ciiva.com/3014/typ-omh-125-3014522.pdf?src-supplier=Avnet, ComponentLink8Description=https://datasheet.ciiva.com/4480/typ-omh-125-4480427.pdf?src-supplier=Mouser, ComponentLink8URL=https://datasheet.ciiva.com/4480/typ-omh-125-4480427.pdf?src-supplier=Mouser, ComponentLink9Description=https://datasheet.ciiva.com/17405/typ-omh-125-17405484.pdf?src-supplier=Avnet+Europe, ComponentLink9URL=https://datasheet.ciiva.com/17405/typ-omh-125-17405484.pdf?src-supplier=Avnet+Europe, ComponentLink10Description=Digikey, ComponentLink10URL=https://www.digikey.ca/product-detail/en/schurter-inc/0031.7701.11/486-1991-ND/640027, Contact Material="Copper Alloy", Contact Plating=Tin, Depth=5.2mm, Fuse Current=5A, Height=6mm, Illumination Type=Illuminated, Lead Free="Lead Free", Length=12mm, Manufacturer Part Number=0031.7701.11, Material=Tin, Mount="Surface Mount", Number of Circuits=1, Number of Poles=1, Packaging=Bulk, Pricing 1="1 = 1.39000, 50 = 1.03400, 100 = 0.93100, 500 = 0.70300, 1000 = 0.52080 (USD)", Radiation Hardening=No, REACH SVHC="No SVHC", RoHS=Yes, Stock 1=11381, Supplier 1=Digi-Key, Terminal Material=Brass, Termination=SMD/SMT, Voltage Rating=125V, Voltage Rating (AC)=125V, Voltage Rating (DC)=125V, Weight=0.016932oz, Width=5.2mm
FB1: "FERRITE BEAD 946 OHM 1206 1LN", Case/Package=1206, Case Code (Metric)=3216, Current Rating=500mA, DC Resistance (DCR)=300mR, Manufacturer 1=Laird, Max Operating Temperature=125°C, Min Operating Temperature=-40°C, Package Quantity=1, Resistance=950R, Supplier Part Number 1=240-2566-1-ND, Test Frequency=100MHz, Case Code (Imperial)=1206, ComponentLink1Description=mouser, ComponentLink1URL=https://www.mouser.ca/ProductDetail/Laird-Performance-Materials/LF1206E152R-10?qs=sGAEpiMZZMtdyQheitOmRQJP4YNOTsGtF9de3w5p7BA%3D, ComponentLink2Description=https://datasheet.ciiva.com/8512/lf1206e152r-10-a-vp-8512625.pdf?src-supplier=Avnet, ComponentLink2URL=https://datasheet.ciiva.com/8512/lf1206e152r-10-a-vp-8512625.pdf?src-supplier=Avnet, ComponentLink3Description=https://datasheet.ciiva.com/1013/lf1206e152r-10-b-1013350.pdf?src-supplier=Digi-Key, ComponentLink3URL=https://datasheet.ciiva.com/1013/lf1206e152r-10-b-1013350.pdf?src-supplier=Digi-Key, ComponentLink4Description=https://www.digikey.com/product-detail/en/laird-signal-integrity-products/LF1206E152R-10/240-2566-1-ND/1236446, ComponentLink4URL=https://www.digikey.com/product-detail/en/laird-signal-integrity-products/LF1206E152R-10/240-2566-1-ND/1236446, Depth=1.8mm, Height=0.051inch, Impedance=300mR, Lead Free="Lead Free", Length=3.2mm, Manufacturer Part Number 1=LF1206E152R-10, Material=Ferrite, Max Current Rating=500mA, Max DC Current=500mA, Mount="Surface Mount", Number of Lines=1, Packaging="Tape and Reel", Pricing 1="1=0.22000, 10=0.17900, 25=0.13960, 50=0.11560, 100=0.09960, 250=0.07972, 500=0.07174, 1000=0.05978 (USD)", RoHS=Yes, Shielding=Unshielded, Stock 1=31440, Supplier 1=Digi-Key, Termination=SMD/SMT, Width=0.063inch
J1: "Header 2x3", Color=Black, Contact Resistance=25mR, Current Rating=3A, Insulation Resistance=10GR, Manufacturer 1=Harwin, Max Operating Temperature=105°C, Min Operating Temperature=-40°C, Package Quantity=1000, Supplier Part Number 1=952-2121-ND, ComponentLink1Description=https://datasheet.ciiva.com/11745/0900766b81034e61-11745752.pdf?src-supplier=RSComponents, ComponentLink1URL=https://datasheet.ciiva.com/11745/0900766b81034e61-11745752.pdf?src-supplier=RSComponents, ComponentLink2Description=https://datasheet.ciiva.com/26899/getdatasheetpartid-483857-26899433.pdf?src-supplier=Verical, ComponentLink2URL=https://datasheet.ciiva.com/26899/getdatasheetpartid-483857-26899433.pdf?src-supplier=Verical, ComponentLink3Description=https://datasheet.ciiva.com/8046/112195-8046906.pdf?src-supplier=Element14, ComponentLink3URL=https://datasheet.ciiva.com/8046/112195-8046906.pdf?src-supplier=Element14, Connector Type="Male Pin", Contact Material=Bronze,Brass, Contact Mating Length=0.24inch, Contact Plating=Tin, Depth=5.08mm, Gender=Male, Housing Color=Black, Housing Material=Nylon, Length=7.62mm, Manufacturer Part Number 1=M20-9980346, Max Current Rating=3A, Mount="Through Hole", Number of Contacts=6, Number of Positions=6, Number of Rows=2, Orientation=Straight, Packaging=Bag, Pitch=2.54mm, Pricing 1="1=0.24000, 10=0.22900, 100=0.15860, 500=0.13420, 1000=0.10980, 5000=0.09760, 10000=0.08845 (USD)", Radiation Hardening=No, REACH SVHC="No SVHC", RoHS=Yes, Row Spacing=0.1inch, Stock 1=16309, Supplier 1=Digi-Key, Termination=Solder
J2 J5: library part 0901200763, "CONN HEADER VERT 3POS 2.54MM", Color=Black, Contact Resistance=20mR, Current Rating=3A, Flammability Rating="UL94 V-2", Insulation Resistance=5GR, Manufacturer=Molex, Manufacturer Part Number=90120-0763, Max Operating Temperature=125°C, Max Voltage Rating (DC)=350.35kV, Min Operating Temperature=-55°C, Package Quantity=3000, Supplier Part Number 1=WM8085-ND, Voltage Rating=350V, Category=Connectors, ComponentLink1Description=https://datasheet.ciiva.com/30177/19330901200763-pcb-headers-30177538.pdf?src-supplier=Onlinecomponents.com, ComponentLink1URL=https://datasheet.ciiva.com/30177/19330901200763-pcb-headers-30177538.pdf?src-supplier=Onlinecomponents.com, ComponentLink2Description=https://datasheet.ciiva.com/11747/0900766b8002f268-11747896.pdf?src-supplier=RSComponents, ComponentLink2URL=https://datasheet.ciiva.com/11747/0900766b8002f268-11747896.pdf?src-supplier=RSComponents, ComponentLink3Description=https://datasheet.ciiva.com/5150/0901200763-pcb-headers-230143-5150559.pdf?src-supplier=Mouser, ComponentLink3URL=https://datasheet.ciiva.com/5150/0901200763-pcb-headers-230143-5150559.pdf?src-supplier=Mouser, Contact Material=Brass, Contact Plating=Tin, Gender=Male, Glow Wire Compliant=Non-compliant, Halogen Free="Not Halogen Free", Housing Color=Black, Housing Material=Polyester, Lead Free="Lead Free", Lead Pitch=2.54mm, Material=Glass, Mount="Through Hole", Number of Circuits=2, Number of Contacts=3, Number of Poles=3, Number of Positions=3, Number of Rows=1, Orientation=Straight, Packaging=Tray, Pitch=2.54mm, Pricing 1="1 = 0.90000, 10 = 0.79100, 100 = 0.68200, 500 = 0.55800, 1000 = 0.49600, 5000 = 0.43400, 10000 = 0.41230 (USD)", Radiation Hardening=No, REACH SVHC=Unknown, RoHS=Yes, Stock 1=17038, Supplier 1=Digi-Key, Termination=Solder, Voltage Rating (AC)=350V, Voltage Rating (DC)=350V, Working Voltage=350V
J3: library part 43650-0205, "HEADER, RIGHT ANGLE, 2WAY", Current Rating=5A, Manufacturer=Molex, Package Quantity=3927, Supplier Part Number 1=WM17581-ND, Voltage Rating=600V, Category=Connectors, ComponentLink1Description=http://www.farnell.com/cad/153635.pdf?src-supplier=Element14, ComponentLink1URL=http://www.farnell.com/cad/153635.pdf?src-supplier=Element14, ComponentLink2Description=http://www.molex.com/webdocs/datasheets/pdf/en-us/0436500205_PCB_HEADERS.pdf?src-supplier=Avnet, ComponentLink2URL=http://www.molex.com/webdocs/datasheets/pdf/en-us/0436500205_PCB_HEADERS.pdf?src-supplier=Avnet, ComponentLink3Description=http://www.molex.com/webdocs/datasheets/pdf/en-us/0436500205_PCB_HEADERS.pdf?src-supplier=Avnet+Europe, ComponentLink3URL=http://www.molex.com/webdocs/datasheets/pdf/en-us/0436500205_PCB_HEADERS.pdf?src-supplier=Avnet+Europe, ComponentLink4Description=http://www.mouser.com/ds/2/276/0436500205_PCB_HEADERS-148686.pdf?src-supplier=Mouser, ComponentLink4URL=http://www.mouser.com/ds/2/276/0436500205_PCB_HEADERS-148686.pdf?src-supplier=Mouser, ComponentLink5Description=Digikey, ComponentLink5URL=https://www.digikey.com/products/en?WT.z_cid=sp_900_0310_buynow&keywords=436500205, Contact Material=Brass, Contact Plating=Gold, Gender=Male, Glow Wire Compliant=Compliant, Halogen Free="Low Halogen", Housing Material=Thermoplastic, Manufacturer Part Number=43650-0205, Number of Circuits=2, Number of Contacts=2, Number of Positions=2, Number of Rows=1, Orientation="Right Angle", Packaging=Tray, Pitch=3mm, Pricing 1="1 = 1.44000, 10 = 1.30500, 100 = 1.11870, 500 = 0.93222, 3927 = 0.74578, 7854 = 0.70849, 11781 = 0.69251 (USD)", RoHS=Yes, Stock 1=2695, Supplier 1=Digi-Key, Termination="Through Hole"
J4: library part 1053141206, "CONN HEADER R/A 6POS 2.5MM", Color=Black, Manufacturer=Molex, Supplier Part Number 1=WM14977-ND, Category=Connectors, ComponentLink1Description=http://www.farnell.com/datasheets/2221464.pdf?src-supplier=Farnell, ComponentLink1URL=http://www.farnell.com/datasheets/2221464.pdf?src-supplier=Farnell, ComponentLink2Description=http://www.farnell.com/datasheets/2059602.pdf?src-supplier=Element14, ComponentLink2URL=http://www.farnell.com/datasheets/2059602.pdf?src-supplier=Element14, ComponentLink3Description=https://www.molex.com/pdm_docs/ps/PS-105300-100-001.pdf?src-supplier=Digi-Key, ComponentLink3URL=https://www.molex.com/pdm_docs/ps/PS-105300-100-001.pdf?src-supplier=Digi-Key, Contact Material=Brass, Contact Plating=Gold, Gender=Male, Manufacturer Part Number=1053141206, Mount="Through Hole", Number of Rows=2, Pricing 1="1 = 1.86000, 10 = 1.68400, 204 = 1.44314, 612 = 1.20260, 1020 = 1.03080, 5100 = 0.91398, 10200 = 0.89336 (USD)", REACH SVHC=Unknown, RoHS=No, Stock 1=3725, Supplier 1=Digi-Key, Termination="Through Hole"
L1: library part 7447709101, "FIXED IND 100UH 2.5A 110 MOHM", Case/Package=1206, Case Code (Metric)=3216, Current Rating=500mA, DC Resistance (DCR)=300mR, Max Operating Temperature=125°C, Min Operating Temperature=-40°C, Package Quantity=1, Resistance=950R, Supplier Part Number 1=732-1248-1-ND, Test Frequency=100MHz, Case Code (Imperial)=1206, ComponentLink1Description=https://www.digikey.ca/product-detail/en/w-rth-elektronik/7447709101/732-1248-1-ND/1639309, ComponentLink1URL=https://www.digikey.ca/product-detail/en/w-rth-elektronik/7447709101/732-1248-1-ND/1639309, Depth=1.8mm, Height=0.051inch, Impedance=300mR, Lead Free="Lead Free", Length=3.2mm, Material=Ferrite, Max Current Rating=500mA, Max DC Current=500mA, Mount="Surface Mount", Number of Lines=1, Packaging="Tape and Reel", RoHS=Yes, Shielding=Unshielded, Supplier 1=Digi-Key, Termination=SMD/SMT, Width=0.063inch
NT1: "NetTie"
PB1 PB2: "SWITCH TACTILE SPST-NO 0.02A 15V", Case/Package=SMD/SMT, Color=White, Contact Current Rating=20mA, Contact Resistance=100mR, Manufacturer 1=Panasonic, Manufacturer Part Number 1=EVQ-Q2Y03W, Max Operating Temperature=85°C, Max Voltage Rating (DC)=15V, Min Operating Temperature=-40°C, Operating Force=3.5N, Package Quantity=1, Supplier Part Number 1=P12961SDKR-ND, Voltage Rating (AC)=250V, Actuator Length=1.3mm, Actuator Type=Standard, ComponentLink1Description=https://datasheet.ciiva.com/25603/0900766b810ad3e5-25603840.pdf?src-supplier=RSComponents, ComponentLink1URL=https://datasheet.ciiva.com/25603/0900766b810ad3e5-25603840.pdf?src-supplier=RSComponents, ComponentLink2Description=https://datasheet.ciiva.com/2901/atk0000ce28-2901284.pdf?src-supplier=Digi-Key, ComponentLink2URL=https://datasheet.ciiva.com/2901/atk0000ce28-2901284.pdf?src-supplier=Digi-Key, ComponentLink3Description=https://datasheet.ciiva.com/2901/atk0000ce28-2901285.pdf?src-supplier=Digi-Key, ComponentLink3URL=https://datasheet.ciiva.com/2901/atk0000ce28-2901285.pdf?src-supplier=Digi-Key, ComponentLink4Description=https://datasheet.ciiva.com/2901/atk0000ce28-2901286.pdf?src-supplier=Digi-Key, ComponentLink4URL=https://datasheet.ciiva.com/2901/atk0000ce28-2901286.pdf?src-supplier=Digi-Key, ComponentLink5Description=https://datasheet.ciiva.com/30127/8atk0000ce28-30127814.pdf?src-supplier=Onlinecomponents.com, ComponentLink5URL=https://datasheet.ciiva.com/30127/8atk0000ce28-30127814.pdf?src-supplier=Onlinecomponents.com, ComponentLink6Description=https://datasheet.ciiva.com/8165/atk0000ce28-8165191.pdf?src-supplier=Avnet, ComponentLink6URL=https://datasheet.ciiva.com/8165/atk0000ce28-8165191.pdf?src-supplier=Avnet, ComponentLink7Description=https://datasheet.ciiva.com/17099/70270561-17099386.pdf?src-supplier=Allied+Electronics, ComponentLink7URL=https://datasheet.ciiva.com/17099/70270561-17099386.pdf?src-supplier=Allied+Electronics, ComponentLink8Description=https://datasheet.ciiva.com/5685/28111-5685339.pdf?src-supplier=Farnell, ComponentLink8URL=https://datasheet.ciiva.com/5685/28111-5685339.pdf?src-supplier=Farnell, ComponentLink9Description=https://datasheet.ciiva.com/16438/atk0000ce28-16438079.pdf?src-supplier=Future+Electronics, ComponentLink9URL=https://datasheet.ciiva.com/16438/atk0000ce28-16438079.pdf?src-supplier=Future+Electronics, Current Rating=20mA, Depth=6.6mm, Electrical Life=100000Cycles, Height=3.1mm, Illumination Type=Non-Illuminated,Illuminated, Lead Free="Lead Free", Length=6mm, Max Current Rating=20mA, Mechanical Life=100000Cycles, Mount="Surface Mount", Number of Poles=1, Orientation=Straight, Packaging="Tape and Reel", Pricing 1="1=0.30000, 10=0.28600, 25=0.27520, 50=0.26520, 100=0.25490, 250=0.23452, 500=0.20394, 1000=0.17335 (USD)", Radiation Hardening=No, REACH SVHC=Unknown, RoHS=Yes, Stock 1=209620, Supplier 1=Digi-Key, Switch Function=Off-Mom, Switch Travel=0.25mm, Termination=SMD/SMT, Thickness=1.8mm, Throw Configuration=SPST, Voltage Rating (DC)=15V, Width=6mm
R1 R2 R3: library part ERJ6ENF1002V, "RES SMD 10K OHM 1% 1/8W 0805", Case/Package=0805, Manufacturer=Yageo, Manufacturer Part Number=ERJ-6ENF1002V, Max Operating Temperature=155°C, Min Operating Temperature=-55°C, Power Rating=125mW, Resistance=10000R, Supplier Part Number 1=P10.0KCCT-ND, Temperature Coefficient=100ppm/°C, Tolerance=1%, Voltage Rating (DC)=150V, Category=Resistors, ComponentLink1Description=https://datasheet.ciiva.com/27056/2078477-27056611.pdf?src-supplier=Jameco, ComponentLink1URL=https://datasheet.ciiva.com/27056/2078477-27056611.pdf?src-supplier=Jameco, Depth=1.25mm, Height=0.5mm, Lead Free="Lead Free", Length=2mm, Mount="Surface Mount", Number of Pins=2, Packaging="Tape and Reel", Pricing 1="1 = 0.100000, 10 = 0.081000, 100 = 0.031100, 1000 = 0.013670, 2500 = 0.011810 (USD)", REACH SVHC="No SVHC", RoHS=No, Stock 1=3342401, Supplier 1=Digi-Key, Width=1.25mm
R4: library part ERJ6ENV1200V, "RES SMD 120 OHM 1% 1/8W 0805", Supplier Part Number 1=P120CCT-ND, ComponentLink1Description=https://datasheet.ciiva.com/11821/0900766b80f80784-11821533.pdf?src-supplier=RSComponents, ComponentLink1URL=https://datasheet.ciiva.com/11821/0900766b80f80784-11821533.pdf?src-supplier=RSComponents, Supplier 1=Digi-Key
R5: "RES SMD 4.7K OHM 1% 1/8W 0805", Case/Package=0402, Case Code (Metric)=1005, Manufacturer 1=Yageo, Max Operating Temperature=155°C, Max Power Dissipation=63mW, Min Operating Temperature=-55°C, Package Quantity=1, Resistance=4.7kR, Supplier Part Number 1=311-4.7KJRCT-ND, Temperature Coefficient=100ppm/°C, Tolerance=5%, Voltage Rating=50V, Case Code (Imperial)=0402, ComponentLink1Description=https://datasheet.ciiva.com/2452/pyu-r-int-thick-7-2452611.pdf?src-supplier=Digi-Key, ComponentLink1URL=https://datasheet.ciiva.com/2452/pyu-r-int-thick-7-2452611.pdf?src-supplier=Digi-Key, ComponentLink2Description=https://datasheet.ciiva.com/2452/pyu-r-int-thick-7-2452612.pdf?src-supplier=Digi-Key, ComponentLink2URL=https://datasheet.ciiva.com/2452/pyu-r-int-thick-7-2452612.pdf?src-supplier=Digi-Key, ComponentLink3Description=https://datasheet.ciiva.com/2452/pyu-r-int-thick-7-2452613.pdf?src-supplier=Digi-Key, ComponentLink3URL=https://datasheet.ciiva.com/2452/pyu-r-int-thick-7-2452613.pdf?src-supplier=Digi-Key, ComponentLink4Description=https://datasheet.ciiva.com/46412/1018594-46412841.pdf?src-supplier=Element14, ComponentLink4URL=https://datasheet.ciiva.com/46412/1018594-46412841.pdf?src-supplier=Element14, ComponentLink5Description=https://datasheet.ciiva.com/16800/pyu-rc0402-51-rohs-l-6-r-16800266.pdf?src-supplier=Future+Electronics, ComponentLink5URL=https://datasheet.ciiva.com/16800/pyu-rc0402-51-rohs-l-6-r-16800266.pdf?src-supplier=Future+Electronics, ComponentLink6Description=https://datasheet.ciiva.com/7850/1018594-7850222.pdf?src-supplier=Element14, ComponentLink6URL=https://datasheet.ciiva.com/7850/1018594-7850222.pdf?src-supplier=Element14, ComponentLink7Description=https://datasheet.ciiva.com/7850/1018594-7850223.pdf?src-supplier=Element14, ComponentLink7URL=https://datasheet.ciiva.com/7850/1018594-7850223.pdf?src-supplier=Element14, Composition="Thick Film", Depth=0.5mm, Features="Moisture Resistant", Height=0.016inch, Lead Free="Lead Free", Length=0.039inch, Manufacturer Part Number 1=RC0402JR-074K7L, Military Standard=Not, Number of Terminations=2, Packaging="Tape and Reel", Power Rating=63mW, Pricing 1="1=0.10000, 10=0.01300, 100=0.00530, 1000=0.00236, 2500=0.00205, 5000=0.00169 (USD)", REACH SVHC="No SVHC", RoHS=Yes, Stock 1=19884749, Supplier 1=Digi-Key, Termination=SMD/SMT, Width=0.02inch
R6: library part ERJ6ENF1500V, "RES SMD 150 OHM 1% 1/8W 0805", Case/Package=0805, Case Code (Metric)=2012, Manufacturer=Panasonic, Max Operating Temperature=155°C, Max Power Dissipation=125mW, Min Operating Temperature=-55°C, Package Quantity=1, Resistance=150R, Supplier Part Number 1=P150CCT-ND, Temperature Coefficient=100ppm/°C, Tolerance=1%, Voltage Rating=150V, Case Code (Imperial)=0805, Category=Resistors, ComponentLink1Description=https://datasheet.ciiva.com/11821/0900766b80f80784-11821520.pdf?src-supplier=RSComponents, ComponentLink1URL=https://datasheet.ciiva.com/11821/0900766b80f80784-11821520.pdf?src-supplier=RSComponents, ComponentLink2Description=https://datasheet.ciiva.com/7887/426256-7887029.pdf?src-supplier=Element14, ComponentLink2URL=https://datasheet.ciiva.com/7887/426256-7887029.pdf?src-supplier=Element14, ComponentLink3Description=https://datasheet.ciiva.com/16761/70260748-16761222.pdf?src-supplier=Allied+Electronics, ComponentLink3URL=https://datasheet.ciiva.com/16761/70260748-16761222.pdf?src-supplier=Allied+Electronics, ComponentLink4Description=https://datasheet.ciiva.com/46373/1678782-46373270.pdf?src-supplier=Element14, ComponentLink4URL=https://datasheet.ciiva.com/46373/1678782-46373270.pdf?src-supplier=Element14, ComponentLink5Description=https://datasheet.ciiva.com/46373/1678782-46373271.pdf?src-supplier=Element14, ComponentLink5URL=https://datasheet.ciiva.com/46373/1678782-46373271.pdf?src-supplier=Element14, ComponentLink6Description=https://datasheet.ciiva.com/30203/aoa0000ce2-30203641.pdf?src-supplier=Onlinecomponents.com, ComponentLink6URL=https://datasheet.ciiva.com/30203/aoa0000ce2-30203641.pdf?src-supplier=Onlinecomponents.com, ComponentLink7Description=https://datasheet.ciiva.com/9185/aoa0000ce2-9185514.pdf?src-supplier=Avnet, ComponentLink7URL=https://datasheet.ciiva.com/9185/aoa0000ce2-9185514.pdf?src-supplier=Avnet, Composition="Thick Film", Contact Plating=Tin, Depth=1.25mm, Features="Automotive AEC-Q200", Height=0.6mm, Lead Free="Lead Free", Length=2mm, Manufacturer Part Number=ERJ6ENF1500V, Military Standard=Not, Mount="Surface Mount", Number of Pins=2, Number of Terminations=2, Power Rating=125mW, Pricing 1="1 = 0.10000, 10 = 0.08100, 100 = 0.03110, 1000 = 0.01367, 2500 = 0.01181 (USD)", Radiation Hardening=No, REACH SVHC="No SVHC", RoHS=Yes, Stock 1=287199, Supplier 1=Digi-Key, Termination=SMD/SMT, Voltage Rating (DC)=150V, Width=0.049inch, Working Voltage=150V